# Altium PCB PCB1.PcbDoc
Units mil, origin at the board's own origin, x right, y up, seen from the top; angles counter-clockwise.
Board outline 6000 x 4000 mil, 2 copper layers (Top Layer, Bottom Layer); 71 components, 60 nets, 209 pads, 0 vias.
Unrouted connection lines stored in the file: 134.
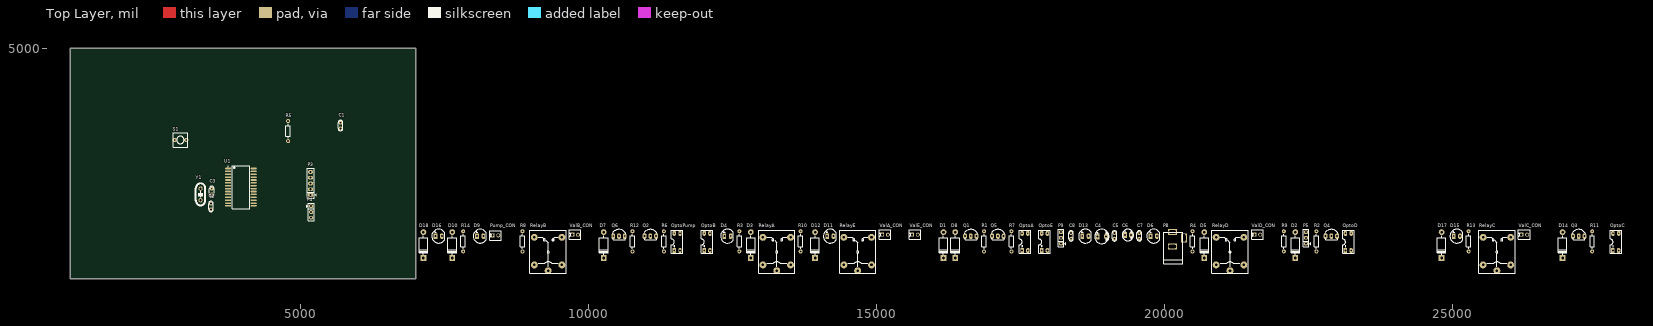
[diagram p0: Top Layer view]
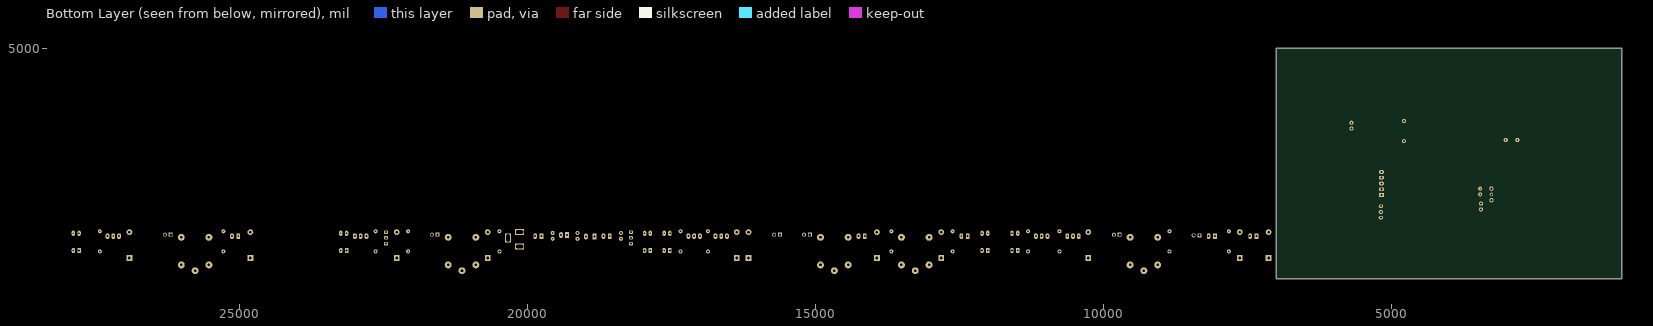
[diagram p1: Bottom Layer view, seen from below]

## Layer stack, top to bottom
Top Layer: signal copper 1.4
Dielectric: dielectric 12.6, FR-4, Dk 4.8
Bottom Layer: signal copper 1.4

## Board outline
1000,1000 7000,1000 7000,5000 1000,5000

## Design rules (kind name [scope] priority, off if disabled: settings)
Clearance [All] p1: gap=10
PolygonConnect [All] p1: connectstyle=Relief reliefconductorwidth=10 reliefentries=4 polygonreliefangle="90 Angle"
RoomDefinition Sheet1 [InComponentClass('Sheet1')] p1: confinementstyle=ConfineIn formatcopy=TRUE lockcomponents=FALSE outline 7045,1060 28670,1060 28670,1970 7045,1970
RoutingVias [All] p1: holewidth=28 width=50 viastyle="Through Hole" minholewidth=28 minwidth=50 maxholewidth=28 maxwidth=50
SilkscreenOverComponentPads [All] p1: minsilkscreentomaskgap=10
SolderMaskExpansion [All] p1: expansion=4
Width [All] p1: maxlimit=10 minlimit=10 preferedwidth=10
27 further rules are at their usual default settings.

## Components (designator, comment, footprint, x,y, rotation, side; value= is the part's Value field where it differs from the comment)
C1 "Cap2" CN1 5690,3610 r90 top
C2 "Cap2" CN1 3440,2205 r90 top
C3 "Cap2" CN1 3455,2465 r90 top
C4 "Cap2" CP1.5/2.5 18835,1735 r0 top
C5 "Cap2" CN1 19130,1695 r90 top
C6 "Cap2" CP1/2 19315,1760 r0 top
C7 "Cap2" CN1 19560,1695 r90 top
C8 "Cap2" CN1 18375,1695 r90 top
D1 "4N4007" D2A 16160,1360 r90 top
D2 "4N4007" D2A 22270,1360 r90 top
D3 "4N4007" D2A 12815,1360 r90 top
D4 "LED1" LED-5TRED 12410,1740 r0 top
D5 "4N4007" D2A 20690,1360 r90 top
D6 "LED1" LED-5TRED 19810,1740 r0 top
D7 "4N4007" D2A 10260,1360 r90 top
D8 "4N4007" D2A 16365,1360 r90 top
D9 "LED1" LED-5TRED 8115,1740 r0 top
D10 "4N4007" D2A 7630,1360 r90 top
D11 "LED1" LED-5TRED 14195,1740 r0 top
D12 "4N4007" D2A 13930,1360 r90 top
D13 "LED1" LED-5TRED 18625,1740 r0 top
D14 "4N4007" D2A 26910,1360 r90 top
D15 "LED1" LED-5TRED 25075,1740 r0 top
D16 "LED1" LED-5TRED 7395,1740 r0 top
D17 "4N4007" D2A 24810,1360 r90 top
D18 "4N4007" D2A 7130,1360 r90 top
OptoA "ValA" DIP4/W0.3 17525,1490 r0 top
OptoB "ValB" DIP4/W0.3 12005,1490 r0 top
OptoC "ValC" DIP4/W0.3 27785,1490 r0 top
OptoD "ValD" DIP4/W0.3 23140,1490 r0 top
OptoE "ValE" DIP4/W0.3 17865,1490 r0 top
OptoPump "Val_Pump" DIP4/W0.3 11485,1490 r0 top
P3 "ICSD" JP5 5170,2455 r90 top
P4 "UART" JP3 5180,2160 r270 top
P5 "7805" JP3 22455,1710 r90 top
P8 "12VDC" DC-IN 20235,1685 r90 top
P9 "LM1117" JP3 18200,1710 r90 top
Pump_CON "Header 2" CON2 8330,1755 r90 top
Q1 "C1815" QTO-92 16635,1740 r0 top
Q2 "C1815" QTO-92 11070,1740 r0 top
Q3 "C1815" QTO-92 27190,1740 r0 top
Q4 "C1815" QTO-92 22895,1740 r0 top
Q5 "C1815" QTO-92 17105,1740 r0 top
Q6 "C1815" QTO-92 10525,1740 r0 top
R1 "Res1" R1/4W 16865,1475 r90 top
R2 "4.7k" R1/4W 22635,1475 r90 top
R3 "Res1" R1/4W 12615,1475 r90 top
R4 "Res1" R1/4W 20485,1475 r90 top
R5 "Res1" R1/4W 4780,3390 r90 top
R6 "Res1" R1/4W 11305,1475 r90 top
R7 "Res1" R1/4W 17340,1475 r90 top
R8 "Res1" R1/4W 8850,1475 r90 top
R9 "Res1" R1/4W 22070,1475 r90 top
R10 "Res1" R1/4W 13680,1475 r90 top
R11 "Res1" R1/4W 27425,1475 r90 top
R12 "Res1" R1/4W 10760,1475 r90 top
R13 "Res1" R1/4W 25280,1475 r90 top
R14 "Res1" R1/4W 7820,1475 r90 top
RelayA "Relay-SPDT" RL_SPDT_10A 13265,1140 r90 top
RelayB "Relay-SPDT" RL_SPDT_10A 9295,1140 r90 top
RelayC "Relay-SPDT" RL_SPDT_10A 25770,1140 r90 top
RelayD "Relay-SPDT" RL_SPDT_10A 21135,1140 r90 top
RelayE "Relay-SPDT" RL_SPDT_10A 14670,1140 r90 top
S1 "SW-PB" SW2 2810,3410 r0 top
U1 "PIC18F26K20-I/SO" SOP_28M_127 3960,2590 r0 top
ValA_CON "Header 2" CON2 15095,1765 r90 top
ValB_CON "Header 2" CON2 9715,1765 r90 top
ValC_CON "Header 2" CON2 26195,1765 r90 top
ValD_CON "Header 2" CON2 21560,1765 r90 top
ValE_CON "Header 2" CON2 15615,1765 r90 top
Y1 "8Mhz" XT2 3260,2465 r270 top

## Footprints (in the part's own frame and the unit in brackets; to place one, negate y for a bottom-side part, rotate by r counter-clockwise, add the part's x,y. Pads: shape width x height; smd on the part's side, far side on the other; paste and mask are expansions set on the pad)
CN1 [mil]
  round 70 hole 31: 1(0,0) 2(100,0)
  silkscreen extent -40,-40 141,40, body extent -60,-30 170,37, height 265
CON2 [mil]
  rect 70x70 hole 39.37 unplated: 1(0,0)
  round 70 hole 39.37 unplated: 2(0,-100)
  silkscreen extent -82,-150 82,50
CP1.5/2.5 [mil] "Tu hoa 33 >100 uF,50V, 220uF/16V,25V ( it su dung )"
  rect 70x100 hole 32: 1(0,0)
  oval 70x100 hole 32: 2(150,0)
  silkscreen extent -50,-125 200,125, body extent -46,-121 202,127, height 434
CP1/2 [mil] "Tu hoa < 22uF/16>50V"
  rect 70x100 hole 32: 1(0,0)
  oval 70x100 hole 32: 2(100,0)
  silkscreen extent -53,-100 147,100, body extent -49,-99 149,99, height 287
D2A [mil] "Diode 2A, W 150mil, L 450mil"
  round 100 hole 45: 1(450,0)
  rect 100x100 hole 45: 2(0,0)
  silkscreen extent 61,-75 391,75, body extent 5,-47 435,54, height 100
DC-IN [mil] "Jac DC input"
  rect 100x160 hole 59.06 slot 125.98 at 90 deg: 1(125,100) 2(-125,100)
  rect 160x100 hole 59.06 slot 125.98 at 0 deg: 3(25,-100)
  silkscreen extent -425,-80 120,250, body extent -410,-105 134,269, height 434
DIP4/W0.3 [mil] "4 PIN, W 300mil, Pin to pin 100mil"
  rect 60x90 hole 31: 1(0,0)
  oval 60x90 hole 31: 2(100,0) 3(100,300) 4(0,300)
  silkscreen extent -50,-50 150,350, body extent -59,-10 159,305, height 170
JP3 [mil] "Jumper 3"
  oval 65x75 hole 36: 1(-100,0) 2(1,0) 3(99,0)
  silkscreen extent -150,-81 150,50, body extent -150,-60 150,55, height 355
JP5 [mil] "JP5"
  rect 65x90 hole 36: 1(0,0)
  oval 65x90 hole 36: 2(100,0) 3(200,0) 4(300,0) 5(400,0)
  silkscreen extent -57,-101 461,60, body extent -48,-53 448,45, height 323
LED-5TRED [mil] "LED 2 PIN, 5 ly , Only colour, pin to pin 110mil"
  rect 65x100 hole 32: 1(-55,0)
  oval 65x100 hole 32: 2(55,0)
  silkscreen extent -120,-120 104,120, body extent -116,-117 98,120, height 339
QTO-92 [mil] "TO-92"
  oval 66x100 hole 32: 1(-100,0) 2(0,0) 3(100,0)
  silkscreen extent -117,-65 120,118, body extent -109,-66 109,95, height 245
R1/4W [mil] "R 1/4W, 2 Pin, 350mil"
  round 70 hole 31: 1(0,0) 2(350,0)
  silkscreen extent 48,-38 302,38, body extent -40,-47 386,47, height 111
RL_SPDT_10A [mil] "Relay SPDT, 5 pin, 10A,W 650mil, L 800mil, H 800mil"
  round 120 hole 45: 1(0,0) 2(580,240) 3(580,-240) 4(100,-240) 5(100,240)
  silkscreen extent -40,-315 700,315
SOP_28M_127 [mm] "SOP, 28-Leads, Body 18.1x8.6mm, Pitch 1.27mm, IPC Low Density"
  oval 2.7x0.7 smd: 1(-5.65,8.255) 2(-5.65,6.985) 3(-5.65,5.715) 4(-5.65,4.445) 5(-5.65,3.175) 6(-5.65,1.905) 7(-5.65,0.635) 8(-5.65,-0.635) 9(-5.65,-1.905) 10(-5.65,-3.175) 11(-5.65,-4.445) 12(-5.65,-5.715) 13(-5.65,-6.985) 14(-5.65,-8.255) 15(5.65,-8.255) 16(5.65,-6.985) 17(5.65,-5.715) 18(5.65,-4.445) 19(5.65,-3.175) 20(5.65,-1.905) 21(5.65,-0.635) 22(5.65,0.635) 23(5.65,1.905) 24(5.65,3.175) 25(5.65,4.445) 26(5.65,5.715) 27(5.65,6.985) 28(5.65,8.255)
  silkscreen extent -5.77,-9.55 3.9,9.55, body extent -5.34,-9.04 5.33,9.04, height 2.64
SW2 [mil] "SW button 2pin, 250x 250 mil"
  round 75 hole 31: 1(0,0) 2(200,0)
  silkscreen extent -25,-125 225,125
XT2 [mm] "Footpin for Crystal 2 pin"
  round 1.524 hole 1: 0(0,0)
  round 1.905 hole 1: 1(-2.54,0) 2(2.54,0)
  silkscreen extent -5.03,-2.29 4.96,2.29, body extent -5.93,-2.36 5.42,2.29, height 3.5

## Part data
C1 C2 C3 C4 C5 C6 C7 C8: "Capacitor"
D1 D2 D3 D5 D7 D8 D10 D12 D14 D17 D18: library part "Diode 1N4007", "1 Amp General Purpose Rectifier"
D4 D6 D9 D11 D13 D15 D16: "Typical RED GaAs LED"
OptoA OptoB OptoC OptoD OptoE OptoPump: library part Optoisolator1, "4-Pin Phototransistor Optocoupler"
P3: library part "Header 5H", "Header, 5-Pin, Right Angle"
P4 P5 P9: library part "Header 3H", "Header, 3-Pin, Right Angle"
P8: library part "Header 2", "Header, 2-Pin"
Pump_CON ValA_CON ValB_CON ValC_CON ValD_CON ValE_CON: "Header, 2-Pin"
Q1 Q2 Q3 Q4 Q5 Q6: library part 2N3904, "NPN General Purpose Amplifier"
R1 R3 R4 R5 R6 R7 R8 R9 R10 R11 R12 R13 R14: "Resistor"
R2: library part Res1, "Resistor"
RelayA RelayB RelayC RelayD RelayE: "Single-Pole Dual-Throw Relay"
S1: "Switch"
U1: "Flash Microcontroller with 10-Bit A/D and nanoWatt Technology, 64K Flash, 28-Pin SOIC, Industrial Temperature Range"
Y1: library part XTAL, "Crystal Oscillator"

## Nets (pads, with @x,y where several pads share a name; then routed paths per layer and width w, separated by ;. In a path a pad name is that pad's centre, name@x,y a point inside that pad or via, vN(x,y) a via of type N, cw(c..) or ccw(c..) an arc to the next point about the centre after c; other vN are vias at no path point)
3V: C1.1 C8.1 P3.2 P9.2 R5.2 R9.1 U1.20
12V: C4.1 C5.1 D1.1 D2.1 D3.2 D5.2 D7.1 D10.2 D12.1 D14.1 D17.2 D18.2 OptoA.4 OptoB.4 OptoC.4 OptoD.4 OptoE.4 OptoPump.4 P5.1 P8.2 Pump_CON.1 Q1.3 Q2.3 Q4.3 Q5.3 Q6.3 R14.1 RelayA.4 RelayB.4 RelayC.4 RelayD.4
GND: C1.2 C2.2 C3.2 C4.2 C5.2 C6.2 C7.2 C8.2 D13.2 OptoA.2 OptoB.2 OptoC.2 OptoD.2 OptoE.2 OptoPump.2 P3.3 P4.1 P5.2 P8.1 P9.1 RelayA.3 RelayB.3 RelayC.3 RelayD.3 RelayE.3 S1.1 U1.8 U1.19
MOTO: OptoPump.1 U1.21
NetC6_1: C6.1 C7.1 P5.3 P9.3
NetD1_2: D1.2 R3.1
NetD2_2: D2.2 R4.1
NetD4_1: D4.1 R3.2
NetD4_2: D4.2 RelayA.5
NetD6_1: D6.1 R4.2
NetD6_2: D6.2 RelayD.5
NetD7_2: D7.2 R8.1
NetD8_1: D8.1 RelayE.4
NetD8_2: D8.2 R10.1
NetD9_1: D9.1 R8.2
NetD11_1: D11.1 R10.2
NetD13_1: D13.1 R9.2
NetD14_2: D14.2 R13.1
NetD15_1: D15.1 R13.2
NetD16_1: D16.1 R14.2
NetOptoA_3: OptoA.3 R1.1
NetOptoB_3: OptoB.3 R6.1
NetOptoC_3: OptoC.3 R11.1
NetOptoD_3: OptoD.3 R2.1
NetOptoE_3: OptoE.3 R7.1
NetOptoPump_3: OptoPump.3 R12.1
NetQ1_2: Q1.2 R1.2
NetQ2_2: Q2.2 R6.2
NetQ3_2: Q3.2 R11.2
NetQ4_2: Q4.2 R2.2
NetQ5_2: Q5.2 R7.2
NetQ6_2: Q6.2 R12.2
NetRelayA_1: RelayA.1 ValA_CON.1
NetRelayA_2: RelayA.2 ValA_CON.2
NetRelayB_1: RelayB.1 ValB_CON.1
NetRelayB_2: RelayB.2 ValB_CON.2
NetRelayC_1: RelayC.1 ValC_CON.1
NetRelayC_2: RelayC.2 ValC_CON.2
NetRelayD_1: RelayD.1 ValD_CON.1
NetRelayD_2: RelayD.2 ValD_CON.2
NetRelayE_1: RelayE.1 ValE_CON.1
NetRelayE_2: RelayE.2 ValE_CON.2
OSC1: C3.1 U1.9 Y1.1
OSC2: C2.1 U1.10 Y1.2
PGC: P3.5 U1.27
PGD: P3.4 U1.28
QA: D3.1 Q1.1
QB: D9.2 D10.1 Q2.1 RelayB.5
QC: D15.2 D17.1 Q3.1 RelayC.5
QD: D5.1 Q4.1
QE: D11.2 D12.2 Q5.1 RelayE.5
QM: D16.2 D18.1 Pump_CON.2 Q6.1
RX: P4.2 U1.18
TX: P4.3 U1.17
VANA: OptoA.1 U1.22
VANB: OptoB.1 U1.23
VANC: OptoC.1 U1.24
VAND: OptoD.1 U1.25
VANE: OptoE.1 U1.26
VPP: P3.1 R5.1 S1.2 U1.1
pads on no net: P8.3 Q3.3 U1.2 U1.3 U1.4 U1.5 U1.6 U1.7 U1.11 U1.12 U1.13 U1.14 U1.15 U1.16 Y1.0